# Altium PCB Module-POWER.PcbDoc
Units mil, origin at the board's own origin, x right, y up, seen from the top; angles counter-clockwise.
Board outline 6000 x 4000 mil, 2 copper layers (Top Layer, Bottom Layer); 39 components, 17 nets, 101 pads, 0 vias.
Unrouted connection lines stored in the file: 82.
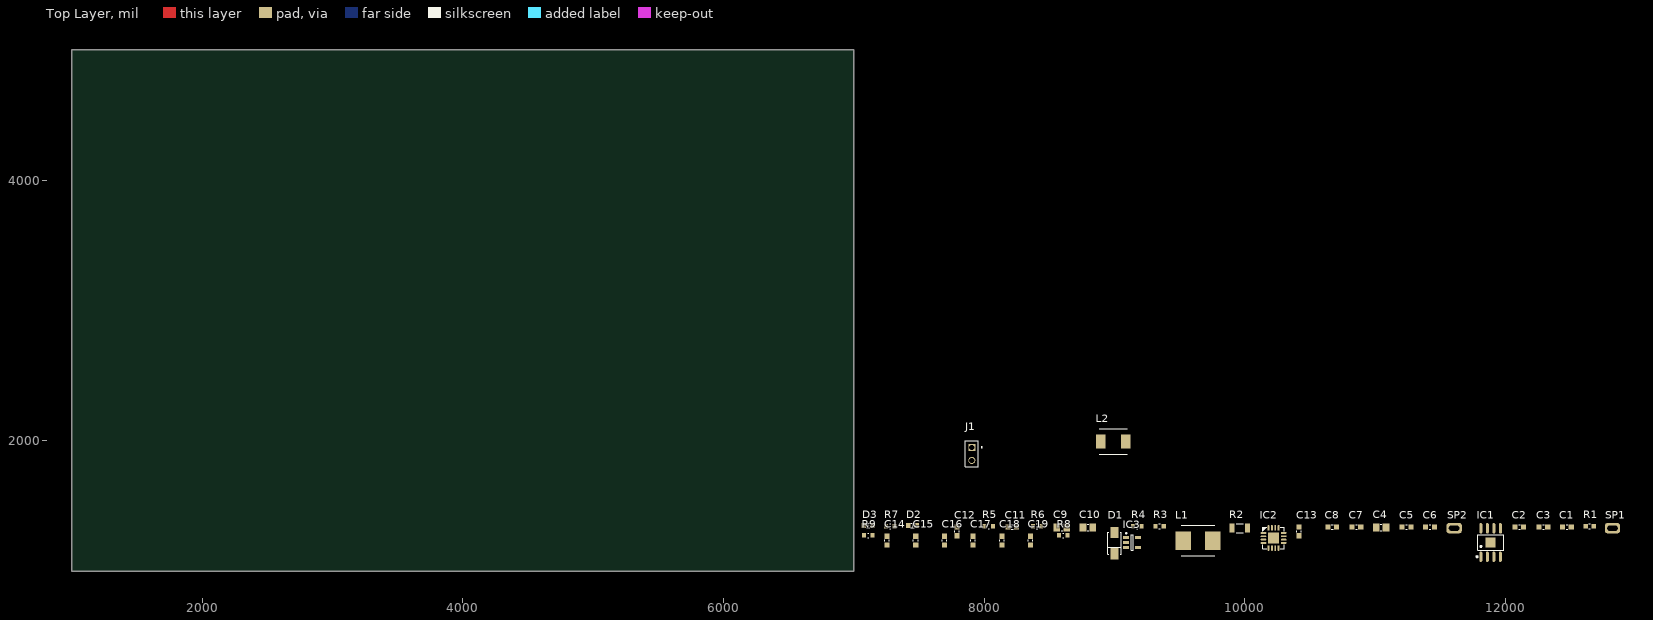
[diagram p0: Top Layer view]
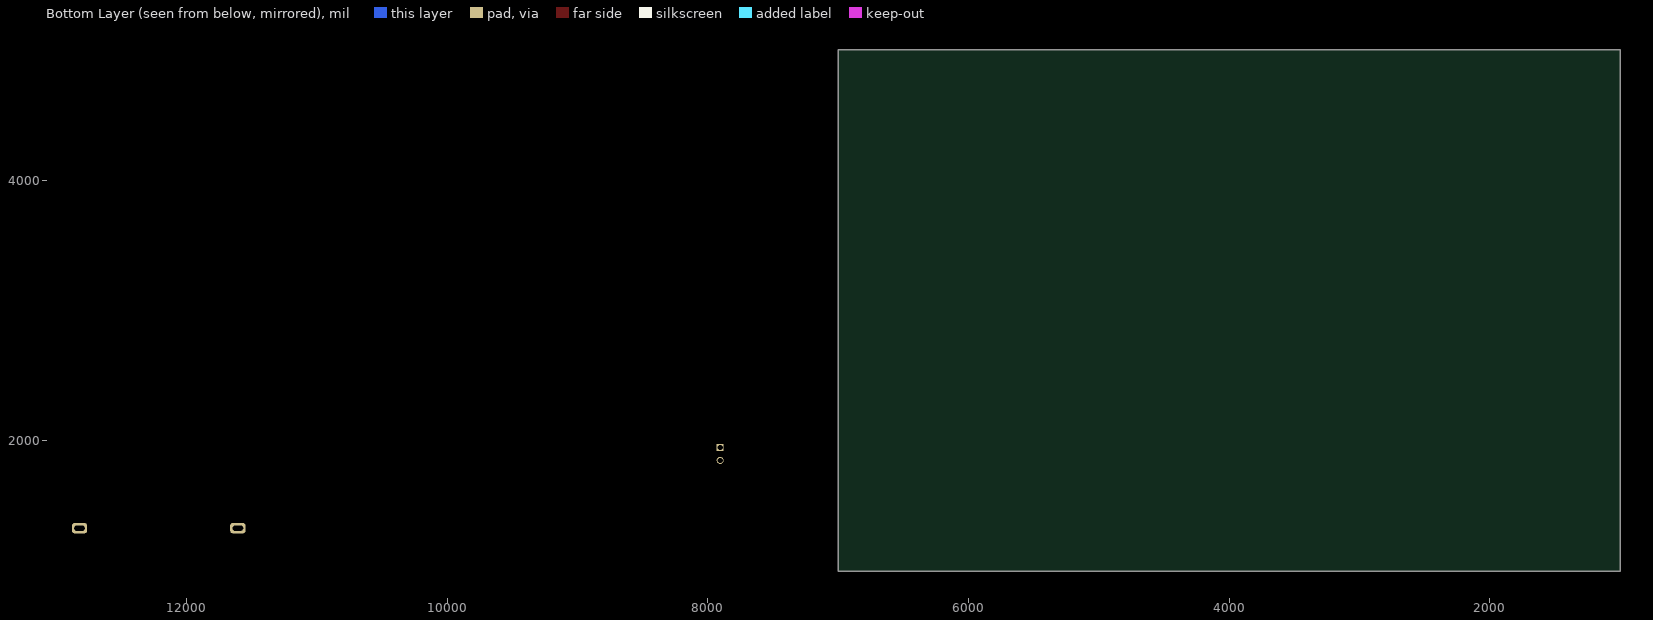
[diagram p1: Bottom Layer view, seen from below]

## Layer stack, top to bottom
Top Solder: solder mask 0.4, Solder Resist, Dk 3.5
Top Layer: signal copper 1.4
Dielectric 1: dielectric 12.6, FR-4, Dk 4.8
Bottom Layer: signal copper 1.4
Bottom Solder: solder mask 0.4, Solder Resist, Dk 3.5

## Board outline
1000,1000 7000,1000 7000,5000 1000,5000

## Design rules (kind name [scope] priority, off if disabled: settings)
Clearance [All] p1: gap=10 ignorepadtopadclearanceinfootprint=FALSE except(0: Arc-Hole Track-Hole SMDPad-Hole THPad-Hole Via-Hole Fill-Hole Poly-Hole Region-Hole Text-Hole)
PolygonConnect [All] p1: connectstyle=Relief reliefconductorwidth=10 reliefentries=4 polygonreliefangle="90 Angle" airgapwidth=10
RoutingVias [All] p1: holewidth=28 width=50 viastyle="Through Hole" minholewidth=28 minwidth=50 maxholewidth=28 maxwidth=50
SolderMaskExpansion [All] p1: expansion=4 istentingtop=FALSE
Width [All] p1: maxlimit=10 minlimit=10 preferedwidth=10
30 further rules are at their usual default settings.

## Components (designator, comment, footprint, x,y, rotation, side; value= is the part's Value field where it differs from the comment)
C1 "0.1 µF ±10% 16V Ceramic Capacitor X7R 0603 (1608 Metric)" SMD-CAP-0603-YAGEO 12470,1340 r0 top value=0.1uF
C2 "22 µF ±20% 10V Ceramic Capacitor X5R 0603 (1608 Metric)" SMD-CAP-0603-YAGEO 12105,1340 r0 top value=22uF
C3 "22 µF ±20% 10V Ceramic Capacitor X5R 0603 (1608 Metric)" SMD-CAP-0603-YAGEO 12290,1340 r0 top value=22uF
C4 "22 µF ±20% 25V Ceramic Capacitor X5R 0805 (2012 Metric)" SMD-CAP-0805-YAGEO 11045,1335 r0 top value=22uF
C5 "2.2 µF ±10% 25V Ceramic Capacitor X5R 0603 (1608 Metric)" SMD-CAP-0603-YAGEO 11240,1340 r0 top value=2.2uF
C6 "0.1 µF ±10% 100V Ceramic Capacitor X7R 0603 (1608 Metric)" SMD-CAP-0603-YAGEO 11420,1340 r0 top value=0.1uF
C7 "0.1 µF ±10% 100V Ceramic Capacitor X7R 0603 (1608 Metric)" SMD-CAP-0603-YAGEO 10855,1340 r0 top value=0.1uF
C8 "0.1 µF ±10% 100V Ceramic Capacitor X7R 0603 (1608 Metric)" SMD-CAP-0603-YAGEO 10670,1340 r0 top value=0.1uF
C9 "22 µF ±20% 25V Ceramic Capacitor X5R 0805 (2012 Metric)" SMD-CAP-0805-YAGEO 8595,1335 r0 top value=22uF
C10 "22 µF ±20% 25V Ceramic Capacitor X5R 0805 (2012 Metric)" SMD-CAP-0805-YAGEO 8795,1335 r0 top value=22uF
C11 "0.1 µF ±10% 100V Ceramic Capacitor X7R 0603 (1608 Metric)" SMD-CAP-0603-YAGEO 8215,1340 r0 top value=0.1uF
C12 "100 pF ±5% 50V Ceramic Capacitor C0G, NP0 0603 (1608 Metric)" SMD-CAP-0603-YAGEO 7790,1305 r90 top value=100pF
C13 "0.1 µF ±10% 100V Ceramic Capacitor X7R 0603 (1608 Metric)" SMD-CAP-0603-YAGEO 10415,1305 r90 top value=0.1uF
C14 "10 µF ±20% 25V Ceramic Capacitor X5R 0603 (1608 Metric)" SMD-CAP-0603-YAGEO 7255,1235 r90 top value=10uF
C15 "1 µF -20%, +80% 10V Ceramic Capacitor Y5V (F) 0603 (1608 Metric)" SMD-CAP-0603-YAGEO 7475,1235 r90 top value=1uF
C16 "0.1 µF ±10% 16V Ceramic Capacitor X7R 0603 (1608 Metric)" SMD-CAP-0603-YAGEO 7695,1235 r90 top value=0.1uF
C17 "10 µF ±20% 25V Ceramic Capacitor X5R 0603 (1608 Metric)" SMD-CAP-0603-YAGEO 7915,1235 r90 top value=10uF
C18 "1 µF -20%, +80% 10V Ceramic Capacitor Y5V (F) 0603 (1608 Metric)" SMD-CAP-0603-YAGEO 8135,1235 r90 top value=1uF
C19 "0.1 µF ±10% 16V Ceramic Capacitor X7R 0603 (1608 Metric)" SMD-CAP-0603-YAGEO 8355,1235 r90 top value=0.1uF
D1 "Diode 40 V 3A Surface Mount DO-214AC (SMA)" SMD-DO-214AC-214-CT 9000,1215 r90 top
D2 "0603 GREEN" LED0603_GREEN 7450,1350 r0 top
D3 "0603 RED" LED0603_RED 7110,1350 r0 top
IC1 "XB8089D" SOIC-8-XB8089D 11885,1220 r0 top
IC2 "5V~12V Lithium-ion/Polymer 1~2 2A TQFN-16-EP(4x4) Battery Management ROHS" "TQFN-16 - TP5100" 10220,1255 r0 top
IC3 "MT3410LB-N" SOT23-5-MT3410 9135,1220 r0 top
J1 "Connector Header Through Hole 2 position" HEADER-2.54-2 7905,1900 r90 top
L1 "10 µH Shielded Drum Core, Wirewound Inductor 3.7 A 74.8mOhm Max 2-SMD, J-Lead" SMD-HxLxW-4.5x6.5x6.0-PEC 9640,1235 r0 top value=10uH
L2 "2.2 µH Shielded Drum Core, Wirewound Inductor 6.3 A 22mOhm Max 2-SMD, J-Lead" SMD-HxLxW-3.0x5.5x5.0-PEC 8990,1995 r0 top value=2.2uH
R1 "100 Ohms ±1% 0.1W, 1/10W Chip Resistor 0603 (1608 Metric) Automotive AEC-Q200, High Voltage Thick Film" SMD-RES-0603-RS 12645,1345 r0 top value=100R
R2 "100 mOhms ±5% 0.25W, 1/4W Chip Resistor 1206 (3216 Metric) Current Sense Thick Film" SMD-RES-1206-YAGEO 9960,1330 r0 top value=0.1R
R3 "10 kOhms ±1% 0.1W, 1/10W Chip Resistor 0603 (1608 Metric) Moisture Resistant Thick Film" SMD-RES-0603-YAGEO 9345,1345 r0 top value=10K
R4 "3 Ohms ±1% 0.1W, 1/10W Chip Resistor 0603 (1608 Metric) Thin Film" SMD-RES-0603-YAGEO 9175,1345 r0 top value=3R
R5 "10 kOhms ±1% 0.1W, 1/10W Chip Resistor 0603 (1608 Metric) Moisture Resistant Thick Film" SMD-RES-0603-YAGEO 8035,1345 r0 top value=10K
R6 "51 kOhms ±1% 0.1W, 1/10W Chip Resistor 0603 (1608 Metric) Moisture Resistant Thick Film" SMD-RES-0603-YAGEO 8405,1345 r0 top value=51K
R7 "10 kOhms ±1% 0.1W, 1/10W Chip Resistor 0603 (1608 Metric) Moisture Resistant Thick Film" SMD-RES-0603-YAGEO 7280,1345 r0 top value=10K
R8 "100 kOhms ±1% 0.1W, 1/10W Chip Resistor 0603 (1608 Metric) Moisture Resistant Thick Film" SMD-RES-0603-YAGEO 8605,1275 r0 top value=100K
R9 "22 kOhms ±1% 0.1W, 1/10W Chip Resistor 0603 (1608 Metric) Moisture Resistant Thick Film" SMD-RES-0603-YAGEO 7110,1275 r0 top value=22K
SP1 "SP" "SOLDERING PAD BIG 3" 12820,1330 r0 top
SP2 "SP" "SOLDERING PAD BIG 3" 11605,1330 r0 top

## Footprints (in the part's own frame and the unit in brackets; to place one, negate y for a bottom-side part, rotate by r counter-clockwise, add the part's x,y. Pads: shape width x height; smd on the part's side, far side on the other; paste and mask are expansions set on the pad)
HEADER-2.54-2 [mm]
  rect 1.37x1.37 hole 1.02: 01(1.27,0)
  round 1.37 hole 1.02: 02(-1.27,0)
  silkscreen extent -2.54,-2.02 2.54,1.27, body extent -2.54,-1.27 2.54,1.27, height 10.62
LED0603_GREEN [mm]
  rect 0.9x1 smd paste+0 mask+0.051: 1(-0.85,0) 2(0.85,0)
  silkscreen extent -0.3,-0.43 0.3,0.43, body extent -0.82,-0.4 0.78,0.4, height 0.53
LED0603_RED [mm]
  rect 0.9x1 smd paste+0 mask+0.051: 1(-0.85,0) 2(0.85,0)
  silkscreen extent -0.3,-0.43 0.3,0.43, body extent -0.82,-0.4 0.78,0.4, height 0.53
SMD-CAP-0603-YAGEO [mm]
  rect 1x1 smd: 1(-0.85,0) 2(0.85,0)
  silkscreen extent -0.15,-0.45 0.15,0.45, body extent -0.8,-0.4 0.8,0.4, height 0.87
SMD-CAP-0805-YAGEO [mm]
  rect 1.3x1.5 smd: 1(-0.95,0) 2(0.95,0)
  silkscreen extent -0.15,-0.65 0.15,0.65, body extent -1,-0.63 1,0.63, height 1.35
SMD-DO-214AC-214-CT [mm]
  rect 2.17x1.57 smd: 1(-2.065,0) 2(2.065,0)
  silkscreen extent -2.12,-1.35 2.12,1.33, body extent -2.47,-1.25 2.47,1.25, height 2.2
SMD-HxLxW-3.0x5.5x5.0-PEC [mm]
  rect 1.905x2.79 smd: 1(-2.425,0) 2(2.425,0)
  silkscreen extent -2.75,-2.5 2.75,2.5, body extent -2.75,-2.5 2.75,2.5, height 3.01
SMD-HxLxW-4.5x6.5x6.0-PEC [mm]
  rect 3x3.6 smd: 1(-2.9,0) 2(2.9,0)
  silkscreen extent -3.25,-3 3.25,3, body extent -3.25,-3 3.25,3, height 4.47
SMD-RES-0603-RS [mm]
  rect 0.87x0.93 smd: 1(-0.78,0) 2(0.78,0)
  silkscreen extent -0.15,-0.45 0.15,0.45, body extent -0.8,-0.4 0.8,0.4, height 0.47
SMD-RES-0603-YAGEO [mm]
  rect 0.79x0.93 smd: 1(-0.82,0) 2(0.82,0)
  silkscreen extent -0.11,-0.45 0.11,0.45, body extent -0.8,-0.4 0.8,0.4, height 0.47
SMD-RES-1206-YAGEO [mm]
  rect 0.97x1.73 smd: 1(-1.48,0) 2(1.48,0)
  silkscreen extent -0.67,-0.85 0.67,0.85, body extent -1.6,-0.8 1.6,0.8, height 0.62
SOIC-8-XB8089D [mm]
  oval 0.574x2.038 smd: 1(-1.905,-2.769) 2(-0.635,-2.769) 3(0.635,-2.769) 4(1.905,-2.769) 5(1.905,2.769) 6(0.635,2.769) 7(-0.635,2.769) 8(-1.905,2.769)
  rect 2x2 smd: 9(0,0)
  silkscreen extent -2.79,-2.92 2.53,1.52, body extent -2.45,-3 2.45,3, height 1.75
"SOLDERING PAD BIG 3" [mm]
  rrect50% 3x2 hole 1 slot 2 at 0 deg: 1(0,0)
SOT23-5-MT3410 [mm]
  rect 1.15x0.6 smd: 1(-1.175,0.95) 2(-1.175,0) 3(-1.175,-0.95) 4(1.175,-0.95) 5(1.175,0.95)
  silkscreen extent -1.3,-1.5 0.2,1.92, body extent -1.4,-1.45 1.4,1.45, height 1.45
"TQFN-16 - TP5100" [mil]
  oval 42.8x14.33 smd paste-3937 mask+2: 1(-77.5,38.39) 2(-77.5,12.79) 3(-77.5,-12.8) 4(-77.5,-38.39) 9(77.5,-38.39) 10(77.5,-12.8) 11(77.5,12.79) 12(77.5,38.39)
  oval 14.33x42.8 smd paste-3937 mask+2: 5(-38.39,-77.5) 6(-12.8,-77.5) 7(12.79,-77.5) 8(38.39,-77.5) 13(38.39,77.5) 14(12.79,77.5) 15(-12.8,77.5) 16(-38.39,77.5)
  rect 82.68x82.68 smd paste-3937 mask+2: 17(0,0)
  silkscreen extent -82,-82 82,82, body extent -79,-79 79,79, height 31

## Part data
C1 C16 C19: library part "CAP; 0.1uF; 16V; 0603; SMD; CC0603KRX7R7BB104", "0603 0.1 uF 16 V ±10 % Tolerance X7R SMT Multilayer Ceramic Capacitor", Case Code (Imperial)=0603, Case Code (Metric)=1608, Dielectric=X7R, Insulation Resistance=100GR, Manufacturer=Yageo, Manufacturer Part Number=CC0603KRX7R7BB104, Max Operating Temperature=125°C, Min Operating Temperature=-55°C, Package Quantity=1, Supplier Part Number=311-1088-1-ND, Tolerance=10%, Voltage=16V, Case/Package=0603, Category="Ceramic Capacitors", ComponentLink1Description=https://datasheet.ciiva.com/11786/0900766b80d84f1d-11786077.pdf?src-supplier=Rs, ComponentLink1URL=https://datasheet.ciiva.com/11786/0900766b80d84f1d-11786077.pdf?src-supplier=Rs, ComponentLink2Description=https://datasheet.ciiva.com/8033/70765-8033799.pdf?src-supplier=Element14, ComponentLink2URL=https://datasheet.ciiva.com/8033/70765-8033799.pdf?src-supplier=Element14, ComponentLink3Description=https://datasheet.ciiva.com/7978/1489800-7978141.pdf?src-supplier=Element14, ComponentLink3URL=https://datasheet.ciiva.com/7978/1489800-7978141.pdf?src-supplier=Element14, ComponentLink4Description=https://datasheet.ciiva.com/28450/1489800-28450552.pdf?src-supplier=Element14, ComponentLink4URL=https://datasheet.ciiva.com/28450/1489800-28450552.pdf?src-supplier=Element14, ComponentLink5Description=https://datasheet.ciiva.com/46430/1734573-46430156.pdf?src-supplier=Element14, ComponentLink5URL=https://datasheet.ciiva.com/46430/1734573-46430156.pdf?src-supplier=Element14, ComponentLink6Description=https://datasheet.ciiva.com/144/mlccorderingcode-144183.pdf?src-supplier=Digikey, ComponentLink6URL=https://datasheet.ciiva.com/144/mlccorderingcode-144183.pdf?src-supplier=Digikey, ComponentLink7Description=https://datasheet.ciiva.com/144/mlccorderingcode-144182.pdf?src-supplier=Digikey, ComponentLink7URL=https://datasheet.ciiva.com/144/mlccorderingcode-144182.pdf?src-supplier=Digikey, ComponentLink8Description=https://datasheet.ciiva.com/144/mlccorderingcode-144184.pdf?src-supplier=Digikey, ComponentLink8URL=https://datasheet.ciiva.com/144/mlccorderingcode-144184.pdf?src-supplier=Digikey, ComponentLink9Description=https://datasheet.ciiva.com/8033/1734573-8033797.pdf?src-supplier=Element14, ComponentLink9URL=https://datasheet.ciiva.com/8033/1734573-8033797.pdf?src-supplier=Element14, ComponentLink10Description=https://datasheet.ciiva.com/13395/upy-gphc-x7r-6-3v-to-50v-8-13395674.pdf?src-supplier=Mouser, ComponentLink10URL=https://datasheet.ciiva.com/13395/upy-gphc-x7r-6-3v-to-50v-8-13395674.pdf?src-supplier=Mouser, ComponentLink11Description=https://datasheet.ciiva.com/11464/upy-gphc-x7r-6-3v-to-50v-8-11464735.pdf?src-supplier=Avnet, ComponentLink11URL=https://datasheet.ciiva.com/11464/upy-gphc-x7r-6-3v-to-50v-8-11464735.pdf?src-supplier=Avnet, ComponentLink12Description=https://datasheet.ciiva.com/15165/getdatasheetpartid-63554-15165387.pdf?src-supplier=Verical, ComponentLink12URL=https://datasheet.ciiva.com/15165/getdatasheetpartid-63554-15165387.pdf?src-supplier=Verical, ComponentLink13Description="Link Digikey", ComponentLink13URL=https://www.digikey.com/en/products/detail/yageo/CC0603KRX7R7BB104/302822, Depth=0.8mm, Designer=TVBac, Halogen Free="Halogen Free", Height=0.8mm, Lead Free="Lead Free", Length=1.6mm, Material=Ceramic, Mounting Technology="Surface Mount", Package=0603, Packaging="Tape and Reel", Pins=2, Pricing="1=0.1, 10=0.042, 50=0.0238, 100=0.0185, 500=0.01392, 1000=0.01094, 4000=0.00915, 8000=0.00836, 12000=0.00796, 28000=0.00756, 100000=0.00547, 200000=0.00529, 400000=0.00497 (USD)", Radiation Hardening=No, Reach SVHC Compliant=No, RoHS=Yes, RoHS Compliant=Yes, Series=CC, Stock=8705780, Supplier=Digikey, Termination=SMD/SMT, Thickness=0.035inch, Voltage Rating=16V, Voltage Rating (DC)=16V, Width=0.031inch
C2 C3: library part "CAP; 22uF; 25V; SMD; CC0603MRX5R6BB226", "Multilayer Ceramic Capacitor, 22 uF, 10 V, ï¿½ 20%, X5R, 0603 [1608 Metric]", Manufacturer=Yageo, Manufacturer Part Number=CC0603MRX5R6BB226, Package=0603, Supplier Part Number=9078094, Category="Ceramic Capacitors", ComponentLink1Description=http://www.mouser.com/ds/2/447/Yageo_UPY-GP_NP0_16V-to-50V_9-358835.pdf?src-supplier=Mouser, ComponentLink1URL=http://www.mouser.com/ds/2/447/Yageo_UPY-GP_NP0_16V-to-50V_9-358835.pdf?src-supplier=Mouser, ComponentLink2Description=http://www.yageo.com/documents/recent/UPY-GPHC_X5R_4V-to-50V_25.pdf?src-supplier=Digikey, ComponentLink2URL=http://www.yageo.com/documents/recent/UPY-GPHC_X5R_4V-to-50V_25.pdf?src-supplier=Digikey, ComponentLink3Description=https://datasheet.octopart.com/CC0603MRX5R6BB226-Yageo-datasheet-137875056.pdf?src-supplier=Future+Electronics, ComponentLink3URL=https://datasheet.octopart.com/CC0603MRX5R6BB226-Yageo-datasheet-137875056.pdf?src-supplier=Future+Electronics, ComponentLink4Description="Link Digikey", ComponentLink4URL=https://www.digikey.com/en/products/detail/yageo/CC0603MRX5R6BB226/5195226, Designer=TVBac, Halogen Free=5694HalogenFree, Lead Free=5697LeadFree, Pricing="4000=0.122, 8000=0.12, 12000=0.119, 16000=0.118 (USD)", RoHS=No, RoHS Compliant=5897YesNo, Stock=780000, Supplier="Future Electronics"
C4 C9 C10: library part "CAP; 22uF; 0805; 25V; SMD; CC0805MKX5R8BB226", "Ceramic Capacitor, Multilayer, Ceramic, 25V, 20% +Tol, 20% -Tol, X5R, 15% TC, 22uF, Surface Mount, 0805", Manufacturer=Yageo, Manufacturer Part Number=CC0805MKX5R8BB226, Package=0805, Supplier Part Number=5072123, Category="Ceramic Capacitors", ComponentLink1Description=http://www.mouser.com/ds/2/447/Yageo_UPY-GP_NP0_16V-to-50V_9-358835.pdf?src-supplier=Mouser, ComponentLink1URL=http://www.mouser.com/ds/2/447/Yageo_UPY-GP_NP0_16V-to-50V_9-358835.pdf?src-supplier=Mouser, ComponentLink2Description=http://www.yageo.com/documents/recent/UPY-GPHC_X5R_4V-to-50V_25.pdf?src-supplier=Digikey, ComponentLink2URL=http://www.yageo.com/documents/recent/UPY-GPHC_X5R_4V-to-50V_25.pdf?src-supplier=Digikey, ComponentLink3Description=https://datasheet.octopart.com/CC0805MKX5R8BB226-Yageo-datasheet-137700085.pdf?src-supplier=Future+Electronics, ComponentLink3URL=https://datasheet.octopart.com/CC0805MKX5R8BB226-Yageo-datasheet-137700085.pdf?src-supplier=Future+Electronics, ComponentLink4Description=https://datasheet.octopart.com/CC0805MKX5R8BB226-Yageo-datasheet-181969996.pdf?src-supplier=Farnell, ComponentLink4URL=https://datasheet.octopart.com/CC0805MKX5R8BB226-Yageo-datasheet-181969996.pdf?src-supplier=Farnell, ComponentLink5Description=https://datasheet.octopart.com/CC0805MKX5R8BB226-Yageo-datasheet-181969996.pdf?src-supplier=Element14, ComponentLink5URL=https://datasheet.octopart.com/CC0805MKX5R8BB226-Yageo-datasheet-181969996.pdf?src-supplier=Element14, Halogen Free=5694HalogenFree, Lead Free=5697LeadFree, Material=4241ConductorMaterial, Pricing="3000=0.112, 6000=0.11, 9000=0.0776, 12000=0.077, 15000=0.0753 (USD)", RoHS=Yes, Stock=90000, Supplier="Future Electronics"
C5: library part "CAP; 2.2uF; 25V; SMD; 0603; CC0603KRX5R8BB225", "0603 2.2 uF 25 V ±10% Tolerance X5R SMT Multilayer Ceramic Capacitor", Manufacturer=Yageo, Manufacturer Part Number=CC0603KRX5R8BB225, Package=0603, Supplier Part Number=2077058, Category="Ceramic Capacitors", ComponentLink1Description=https://datasheet.ciiva.com/26936/getdatasheetpartid-782757-26936061.pdf?src-supplier=Verical, ComponentLink1URL=https://datasheet.ciiva.com/26936/getdatasheetpartid-782757-26936061.pdf?src-supplier=Verical, Designer=TVBac, Halogen Free=5694HalogenFree, Height=900um, Lead Free=5697LeadFree, Material=4241ConductorMaterial, Pricing="4000=0.0441, 8000=0.0434, 12000=0.0429, 16000=0.0426, 20000=0.0417 (USD)", RoHS=Yes, Stock=108000, Supplier="Future Electronics"
C6 C7 C8 C11 C13: library part "CAP; 0.1uF; 100V; 0603; SMD; CC0603KRX7R0BB104", "Multilayer Ceramic Capacitors MLCC - SMD/SMT 100V 0.1uF X7R 0603 10%", Case Code (Imperial)=0603, Case Code (Metric)=1608, Dielectric=X7R, Manufacturer=Yageo, Manufacturer Part Number=CC0603KRX7R0BB104, Max Operating Temperature=125°C, Min Operating Temperature=-55°C, Package Quantity=4000, Supplier Part Number=311-1523-1-ND, Tolerance=10%, Voltage Rating=100V, Case/Package=0603, Category="Ceramic Capacitors", ComponentLink1Description=https://datasheet.ciiva.com/6277/mlccorderingcode-6277082.pdf?src-supplier=Digikey, ComponentLink1URL=https://datasheet.ciiva.com/6277/mlccorderingcode-6277082.pdf?src-supplier=Digikey, ComponentLink2Description=https://datasheet.ciiva.com/6277/mlccorderingcode-6277081.pdf?src-supplier=Digikey, ComponentLink2URL=https://datasheet.ciiva.com/6277/mlccorderingcode-6277081.pdf?src-supplier=Digikey, ComponentLink3Description=https://datasheet.ciiva.com/6277/mlccorderingcode-6277030.pdf?src-supplier=Digikey, ComponentLink3URL=https://datasheet.ciiva.com/6277/mlccorderingcode-6277030.pdf?src-supplier=Digikey, ComponentLink4Description="Link Digikey", ComponentLink4URL=https://www.digikey.com/en/products/detail/yageo/CC0603KRX7R0BB104/3476111?s=N4IgTCBcDaIMwEYEFoEFYx1cgcgERAF0BfIA, Designer=TVBac, Height=900um, Lead Free=5697LeadFree, Length=0.063inch, Material=4241ConductorMaterial, Mounting Technology="Surface Mount", Package=0603, Packaging="Tape and Reel", Pricing="1=0.17, 10=0.113, 50=0.0676, 100=0.0531, 500=0.03922, 1000=0.03246, 4000=0.02764, 8000=0.02572, 12000=0.02443, 28000=0.02314, 100000=0.01752, 200000=0.0171, 400000=0.01607 (USD)", RoHS=Yes, RoHS Compliant=Yes, Series=CC, Stock=5373598, Supplier=Digikey, Termination=SMD/SMT, Thickness=0.035inch, Voltage Rating (DC)=100V, Weight=7.1E-05oz, Width=0.031inch
C12: library part "CAP; 100pF; 0603; SMD; CC0603JRNPO9BN101", "0603 100 pF 50 V ±5 % Tolerance NP0 SMT Multilayer Ceramic Capacitor", Case Code (Imperial)=0603, Case Code (Metric)=1608, Dielectric=C0G, Insulation Resistance=100GR, Manufacturer=Yageo, Manufacturer Part Number=CC0603JRNPO9BN101, Max Operating Temperature=125°C, Min Operating Temperature=-55°C, Package Quantity=4000, Supplier Part Number=4143889, Temperature Coefficient=30ppm/°C, Tolerance=5%, Voltage=50V, Case/Package=0603, Category="Ceramic Capacitors", ComponentLink1Description=https://datasheet.ciiva.com/11786/0900766b8079c870-11786060.pdf?src-supplier=Rs, ComponentLink1URL=https://datasheet.ciiva.com/11786/0900766b8079c870-11786060.pdf?src-supplier=Rs, ComponentLink2Description=https://datasheet.ciiva.com/7978/1443161-7978127.pdf?src-supplier=Element14, ComponentLink2URL=https://datasheet.ciiva.com/7978/1443161-7978127.pdf?src-supplier=Element14, ComponentLink3Description=https://datasheet.ciiva.com/28450/1443161-28450457.pdf?src-supplier=Element14, ComponentLink3URL=https://datasheet.ciiva.com/28450/1443161-28450457.pdf?src-supplier=Element14, ComponentLink4Description=https://datasheet.ciiva.com/46430/1835847-46430151.pdf?src-supplier=Element14, ComponentLink4URL=https://datasheet.ciiva.com/46430/1835847-46430151.pdf?src-supplier=Element14, ComponentLink5Description=https://datasheet.ciiva.com/144/mlccorderingcode-144629.pdf?src-supplier=Digikey, ComponentLink5URL=https://datasheet.ciiva.com/144/mlccorderingcode-144629.pdf?src-supplier=Digikey, ComponentLink6Description=https://datasheet.ciiva.com/144/mlccorderingcode-144628.pdf?src-supplier=Digikey, ComponentLink6URL=https://datasheet.ciiva.com/144/mlccorderingcode-144628.pdf?src-supplier=Digikey, ComponentLink7Description=https://datasheet.ciiva.com/144/mlccorderingcode-144630.pdf?src-supplier=Digikey, ComponentLink7URL=https://datasheet.ciiva.com/144/mlccorderingcode-144630.pdf?src-supplier=Digikey, ComponentLink8Description=https://datasheet.ciiva.com/11464/upy-gp-np0-16v-to-50v-8-11464725.pdf?src-supplier=Avnet, ComponentLink8URL=https://datasheet.ciiva.com/11464/upy-gp-np0-16v-to-50v-8-11464725.pdf?src-supplier=Avnet, ComponentLink9Description=https://datasheet.ciiva.com/26829/getdatasheetpartid-403525-26829372.pdf?src-supplier=Verical, ComponentLink9URL=https://datasheet.ciiva.com/26829/getdatasheetpartid-403525-26829372.pdf?src-supplier=Verical, Depth=0.8mm, Halogen Free=5694HalogenFree, Height=0.8mm, Lead Free="Lead Free", Length=1.6mm, Mounting Technology="Surface Mount", Package=0603, Packaging="Tape and Reel", Pins=2, Pricing="4000=0.0039, 12000=0.0038, 20000=0.0037, 80000=0.0036, 120000=0.0035 (USD)", Radiation Hardening=No, Reach SVHC Compliant=Unknown, RoHS=Yes, RoHS Compliant=Yes, Series=CC, Stock=1960000, Supplier="Future Electronics", Termination=SMD/SMT, Voltage Rating=50V, Voltage Rating (AC)=50V, Voltage Rating (DC)=50V, Width=0.8mm
C14 C17: library part "CAP; 10uF; 25V; SMD; 0603; CC0603MRX5R8BB106", "Multilayer Ceramic Capacitor, 10 uF, 25 V, ï¿½ 20%, X5R, 0603 [1608 Metric]", Case Code (Imperial)=0603, Case Code (Metric)=1608, Dielectric=X5R, Manufacturer=Yageo, Manufacturer Part Number=CC0603MRX5R8BB106, Max Operating Temperature=85°C, Min Operating Temperature=-55°C, Supplier Part Number=3086968, Tolerance=20%, Voltage Rating=25V, Case/Package=0603, Category="Ceramic Capacitors", ComponentLink1Description=https://www.yageo.com/upload/media/product/productsearch/datasheet/mlcc/UPY-GPHC_X5R_4V-to-50V_26.pdf?src-supplier=Digikey, ComponentLink1URL=https://www.yageo.com/upload/media/product/productsearch/datasheet/mlcc/UPY-GPHC_X5R_4V-to-50V_26.pdf?src-supplier=Digikey, ComponentLink2Description=https://datasheet.octopart.com/CC0603MRX5R8BB106-Yageo-datasheet-182965619.pdf?src-supplier=Farnell, ComponentLink2URL=https://datasheet.octopart.com/CC0603MRX5R8BB106-Yageo-datasheet-182965619.pdf?src-supplier=Farnell, ComponentLink3Description="Link Digikey", ComponentLink3URL=https://www.digikey.com/en/products/detail/yageo/CC0603MRX5R8BB106/7164378, Designer=TVBac, Halogen Free="Halogen Free", Lead Free="Lead Free", Mounting Technology="Surface Mount", Package=0603, Packaging="Cut Tape", Pricing="4000=0.155, 8000=0.153, 12000=0.151 (USD)", RoHS=Yes, RoHS Compliant=Yes, Series=CC, Stock=296000, Supplier="Future Electronics", Voltage Rating (DC)=25V
C15 C18: library part "CAP; 1uF; 10V; 0603; SMD; CC0603ZRY5V6BB105", "Surface Mount Ceramic Multilayer Capacitor 1uF -20% to 80% Y5V 10V 0603 Paper T/R", Dielectric Material=4241ConductorMaterial, Manufacturer=Yageo, Manufacturer Part Number=CC0603ZRY5V6BB105, Package=0603, Supplier Part Number=311-1357-1-ND, Voltage Rating (AC)=10V, Category="Ceramic Capacitors", ComponentLink1Description=https://datasheet.ciiva.com/23768/97931-23768032.pdf?src-supplier=Newark, ComponentLink1URL=https://datasheet.ciiva.com/23768/97931-23768032.pdf?src-supplier=Newark, ComponentLink2Description=https://datasheet.ciiva.com/144/mlccorderingcode-144397.pdf?src-supplier=Digikey, ComponentLink2URL=https://datasheet.ciiva.com/144/mlccorderingcode-144397.pdf?src-supplier=Digikey, ComponentLink3Description=https://datasheet.ciiva.com/144/mlccorderingcode-144398.pdf?src-supplier=Digikey, ComponentLink3URL=https://datasheet.ciiva.com/144/mlccorderingcode-144398.pdf?src-supplier=Digikey, ComponentLink4Description=https://datasheet.ciiva.com/144/mlccorderingcode-144399.pdf?src-supplier=Digikey, ComponentLink4URL=https://datasheet.ciiva.com/144/mlccorderingcode-144399.pdf?src-supplier=Digikey, ComponentLink5Description=https://datasheet.ciiva.com/5425/upy-gphc-y5v-6-3v-to-50v-5-5425434.pdf?src-supplier=Mouser, ComponentLink5URL=https://datasheet.ciiva.com/5425/upy-gphc-y5v-6-3v-to-50v-5-5425434.pdf?src-supplier=Mouser, ComponentLink6Description=https://datasheet.ciiva.com/7978/1132289-7978185.pdf?src-supplier=Element14, ComponentLink6URL=https://datasheet.ciiva.com/7978/1132289-7978185.pdf?src-supplier=Element14, ComponentLink7Description=https://datasheet.ciiva.com/8033/1132289-8033926.pdf?src-supplier=Element14, ComponentLink7URL=https://datasheet.ciiva.com/8033/1132289-8033926.pdf?src-supplier=Element14, ComponentLink8Description=https://datasheet.ciiva.com/8033/1132289-8033928.pdf?src-supplier=Element14, ComponentLink8URL=https://datasheet.ciiva.com/8033/1132289-8033928.pdf?src-supplier=Element14, ComponentLink9Description="Link Digikey", ComponentLink9URL=https://www.digikey.com/en/products/detail/yageo/CC0603ZRY5V6BB105/2103095, Designer=TVBac, Halogen Free=5694HalogenFree, Lead Free=5697LeadFree, Pricing="1=0.1, 10=0.041, 50=0.0234, 100=0.0182, 500=0.01366, 1000=0.01074 (USD)", RoHS=Yes, Stock=2070294, Supplier=Digikey
D1: library part "DIODE; SMD; SCHOTTKY; SS34-HF", "Diode Schottky Si 40V 3A 2-Pin SMA T/R", Manufacturer=Comchip, Manufacturer Part Number=SS34-HF, Supplier Part Number=641-2115-1-ND, Category=LDO, ComponentLink1Description=http://www.comchiptech.com/admin/files/product/20190514101641.pdf?src-supplier=Digikey, ComponentLink1URL=http://www.comchiptech.com/admin/files/product/20190514101641.pdf?src-supplier=Digikey, ComponentLink2Description="Link Digikey", ComponentLink2URL=https://www.digikey.com/en/products/detail/comchip-technology/SS34-HF/10279693, Designer=TVBac, Pricing="1=0.46, 10=0.325, 100=0.164, 500=0.14536, 1000=0.11312, 2000=0.10124 (USD)", RoHS=Yes, RoHS Compliant=Yes, Stock=65957, Supplier=Digikey
D2: library part L0603_GREEN, "225mcd~450mcd Colorless Transparent Lens -40℃~+85℃ Positive Stick 520nm~535nm Green 120° 70mW 2.4V~3V 0603 LED Indication - Discrete ROHS", Manufacture Part Number=A-SP192DGHC-C01-4T, Manufacturer=Amicc, Package=0603, Link=https://www.lcsc.com/product-detail/LED-Indication-Discrete_Amicc-A-SP192DGHC-C01-4T_C19171301.html?s_z=n_LED%200603%20green, Packaging="Cut Tape (CT)"
D3: library part L0603_RED, "20mA 330mcd Colorless Transparent Lens -20℃~+85℃ Positive Stick 620nm~630nm Red 120° 50mW 2.3V 0603 LED Indication - Discrete ROHS", Manufacture Part Number=XL-1608SURC-06, Manufacturer=XINGLIGHT, Package=0603, Link=https://www.lcsc.com/product-detail/LED-Indication-Discrete_XINGLIGHT-XL-1608SURC-06_C965799.html?s_z=n_LED%200603%20red, Packaging="Cut Tape (CT)"
IC2: library part TP5100
IC3: "SOT-23-5 DC-DC Converters ROHS", LCSC Part=C42420805, Manufacturer="XI'AN Aerosemi Tech", Package=SOT-23-5, Link=https://www.lcsc.com/product-detail/DC-DC-Converters_XI-AN-Aerosemi-Tech-MT3410LB-N_C42420805.html?s_z=n_mt3410l, Manufacture Part Number=MT3410LB-N, Packaging="Cut Tape"
J1: library part "HEADER; 2PIN; 2.54; VER; TSW-101-15-T-D", "Headers & Wire Housings Classic PCB Header Strips, 0.100 pitch", Manufacturer=Samtec, Manufacturer Part Number=TSW-101-15-T-D, Category=Connectors, ComponentLink1Description=https://datasheet.ciiva.com/10283/htsw-th-10283318.pdf?src-supplier=Avnet, ComponentLink1URL=https://datasheet.ciiva.com/10283/htsw-th-10283318.pdf?src-supplier=Avnet, ComponentLink2Description="Link Digikey", ComponentLink2URL=https://www.digikey.com/en/products/detail/samtec-inc/TSW-101-15-T-D/7861723, Designer=TVBac, Pricing="1=0.18, 50=0.14, 100=0.12, 500=0.1, 1000=0.07, 2000=0.06, 5000=0.05 (USD)", RoHS=Yes, Stock=4464, Supplier="Arrow Electronics", Supplier Part Number=TSW-101-15-T-D
L1: library part "IND; 10uH; 3.7A; ETQ-P3M100HFN", "Power Choke Shielded Wirewound 10uH 20% 100KHz Metal 3.7A 0.0748Ohm DCR Automotive T/R", Case/Package=SMD/SMT, DC Resistance (DCR)=74.8mR, Manufacturer=Panasonic, Manufacturer Part Number=ETQ-P3M100HFN, Max Operating Temperature=150°C, Min Operating Temperature=-40°C, Ratings=AEC-Q200, Saturation Current=5.5A, Supplier Part Number=667-ETQ-P3M100HFN, Test Frequency=100kHz, Tolerance=20%, Category="Fixed Inductors", ComponentLink1Description=http://datasheet.octopart.com/ETQ-P3M100HFN-Panasonic-datasheet-136768817.pdf?src-supplier=Rs, ComponentLink1URL=http://datasheet.octopart.com/ETQ-P3M100HFN-Panasonic-datasheet-136768817.pdf?src-supplier=Rs, ComponentLink2Description=https://datasheet.octopart.com/ETQP3M100HFN-Panasonic-datasheet-179054672.pdf?src-supplier=Farnell, ComponentLink2URL=https://datasheet.octopart.com/ETQP3M100HFN-Panasonic-datasheet-179054672.pdf?src-supplier=Farnell, ComponentLink3Description=http://datasheet.octopart.com/ETQ-P3M100HFN-Panasonic-datasheet-136768817.pdf?src-supplier=Verical, ComponentLink3URL=http://datasheet.octopart.com/ETQ-P3M100HFN-Panasonic-datasheet-136768817.pdf?src-supplier=Verical, ComponentLink4Description=http://datasheet.octopart.com/ETQ-P3M100HFN-Panasonic-datasheet-136768817.pdf?src-supplier=Onlinecomponents.com, ComponentLink4URL=http://datasheet.octopart.com/ETQ-P3M100HFN-Panasonic-datasheet-136768817.pdf?src-supplier=Onlinecomponents.com, ComponentLink5Description=http://datasheet.octopart.com/ETQ-P3M100HFN-Panasonic-datasheet-136768817.pdf?src-supplier=Arrow+Electronics, ComponentLink5URL=http://datasheet.octopart.com/ETQ-P3M100HFN-Panasonic-datasheet-136768817.pdf?src-supplier=Arrow+Electronics, ComponentLink6Description=http://datasheet.octopart.com/ETQ-P3M100HFN-Panasonic-datasheet-136768817.pdf?src-supplier=Avnet, ComponentLink6URL=http://datasheet.octopart.com/ETQ-P3M100HFN-Panasonic-datasheet-136768817.pdf?src-supplier=Avnet, ComponentLink7Description=http://datasheet.octopart.com/ETQ-P3M100HFN-Panasonic-datasheet-136768817.pdf?src-supplier=Future+Electronics, ComponentLink7URL=http://datasheet.octopart.com/ETQ-P3M100HFN-Panasonic-datasheet-136768817.pdf?src-supplier=Future+Electronics, ComponentLink8Description=https://datasheet.octopart.com/ETQP3M100HFN-Panasonic-datasheet-97125959.pdf?src-supplier=Element14, ComponentLink8URL=https://datasheet.octopart.com/ETQP3M100HFN-Panasonic-datasheet-97125959.pdf?src-supplier=Element14, ComponentLink9Description=http://datasheet.octopart.com/ETQ-P3M100HFN-Panasonic-datasheet-136768817.pdf?src-supplier=Digikey, ComponentLink9URL=http://datasheet.octopart.com/ETQ-P3M100HFN-Panasonic-datasheet-136768817.pdf?src-supplier=Digikey, ComponentLink10Description=http://datasheet.octopart.com/ETQ-P3M100HFN-Panasonic-datasheet-136768817.pdf?src-supplier=Newark, ComponentLink10URL=http://datasheet.octopart.com/ETQ-P3M100HFN-Panasonic-datasheet-136768817.pdf?src-supplier=Newark, ComponentLink11Description=http://datasheet.octopart.com/ETQ-P3M100HFN-Panasonic-datasheet-136768817.pdf?src-supplier=Mouser, ComponentLink11URL=http://datasheet.octopart.com/ETQ-P3M100HFN-Panasonic-datasheet-136768817.pdf?src-supplier=Mouser, ComponentLink12Description=https://datasheet.octopart.com/ETQ-P3M100HFN-Panasonic-datasheet-136768817.pdf?src-supplier=Newark, ComponentLink12URL=https://datasheet.octopart.com/ETQ-P3M100HFN-Panasonic-datasheet-136768817.pdf?src-supplier=Newark, ComponentLink13Description=http://datasheet.octopart.com/ETQ-P3M100HFN-Panasonic-datasheet-136768817.pdf?src-supplier=TTI, ComponentLink13URL=http://datasheet.octopart.com/ETQ-P3M100HFN-Panasonic-datasheet-136768817.pdf?src-supplier=TTI, ComponentLink14Description=http://datasheet.octopart.com/ETQ-P3M100HFN-Panasonic-datasheet-136768817.pdf?src-supplier=Electro+Sonic, ComponentLink14URL=http://datasheet.octopart.com/ETQ-P3M100HFN-Panasonic-datasheet-136768817.pdf?src-supplier=Electro+Sonic, ComponentLink15Description=http://datasheet.octopart.com/ETQ-P3M100HFN-Panasonic-datasheet-136768817.pdf?src-supplier=NAC+Semi, ComponentLink15URL=http://datasheet.octopart.com/ETQ-P3M100HFN-Panasonic-datasheet-136768817.pdf?src-supplier=NAC+Semi, Core Material=Metal,Composite, Mounting Technology="Surface Mount", Packaging="Cut Tape", Pricing="1=1.11, 10=0.973, 50=0.756, 100=0.705, 1000=0.627, 10000=0.58 (USD)", RoHS=No, Series=PCC-M0630M, Shielding=Shielded, Stock=1835, Supplier=Mouser
L2: library part "IND; 2.2uH; SMD; 6.3A; ETQ-P3M2R2KVP", "Ind Power Shielded Wirewound 2.2uH 20% 100KHz Metal 6.3A (5.5 X 5 X 3mm) Emboss T/R", Case/Package=SMD/SMT, DC Resistance (DCR)=22mR, Inductance Tolerance=20%, Manufacturer=Panasonic, Manufacturer Part Number=ETQ-P3M2R2KVP, Max Operating Temperature=155°C, Min Operating Temperature=-55°C, Ratings=AEC-Q200, RMS Current (Irms)=5.2A, Saturation Current=10.1A, Supplier Part Number=P19759CT-ND, Test Frequency=100kHz, Category="Fixed Inductors", ComponentLink1Description=http://www.farnell.com/datasheets/2820815.pdf?src-supplier=Farnell, ComponentLink1URL=http://www.farnell.com/datasheets/2820815.pdf?src-supplier=Farnell, ComponentLink2Description=https://industrial.panasonic.com/cdbs/www-data/pdf/AGL0000/AGL0000C63.pdf?src-supplier=Digikey, ComponentLink2URL=https://industrial.panasonic.com/cdbs/www-data/pdf/AGL0000/AGL0000C63.pdf?src-supplier=Digikey, ComponentLink3Description=http://www.farnell.com/datasheets/2820815.pdf?src-supplier=Newark, ComponentLink3URL=http://www.farnell.com/datasheets/2820815.pdf?src-supplier=Newark, ComponentLink4Description=https://datasheet.octopart.com/ETQP3M2R2KVP-Panasonic-datasheet-98950113.pdf?src-supplier=Newark, ComponentLink4URL=https://datasheet.octopart.com/ETQP3M2R2KVP-Panasonic-datasheet-98950113.pdf?src-supplier=Newark, ComponentLink5Description=http://www.farnell.com/datasheets/2144948.pdf?src-supplier=Element14, ComponentLink5URL=http://www.farnell.com/datasheets/2144948.pdf?src-supplier=Element14, ComponentLink6Description=https://datasheet.octopart.com/ETQP3M2R2KVP-Panasonic-datasheet-65850535.pdf?src-supplier=Future+Electronics, ComponentLink6URL=https://datasheet.octopart.com/ETQP3M2R2KVP-Panasonic-datasheet-65850535.pdf?src-supplier=Future+Electronics, ComponentLink7Description=https://datasheet.octopart.com/ETQP3M2R2KVP-Panasonic-datasheet-137675050.pdf?src-supplier=TME, ComponentLink7URL=https://datasheet.octopart.com/ETQP3M2R2KVP-Panasonic-datasheet-137675050.pdf?src-supplier=TME, ComponentLink8Description="Link Digikey", ComponentLink8URL=https://www.digikey.com/en/products/detail/panasonic-electronic-components/ETQ-P3M2R2KVP/6134777, Core Material=Metal,Composite, Designer=TVBac, Mounting Technology="Surface Mount", Packaging="Cut Tape", Pricing="1=0.89, 10=0.752, 25=0.6836, 50=0.6426, 100=0.5333, 250=0.49224, 500=0.4649, 1000=0.42387 (USD)", Reach SVHC Compliant=Unknown, RoHS=Yes, RoHS Compliant=Yes, Series=PCC-M0530M, Shielding=Shielded, Stock=6203, Supplier=Digikey, Tolerance=20%
R1: library part "RES; 100R; 0603; SMD; KTR03EZPF1000", "Res Thick Film 0603 100 Ohm 1% 0.1W(1/10W) ±100ppm/C Pad SMD T/R Automotive AEC-Q200", Case Code (Imperial)=0603, Case Code (Metric)=1608, Manufacturer=Rohm, Manufacturer Part Number=KTR03EZPF1000, Max Operating Temperature=155°C, Max Power Dissipation=100mW, Min Operating Temperature=-55°C, Ratings=AEC-Q200, Supplier Part Number=755-KTR03EZPF1000, Temperature Coefficient=100ppm/°C, Tolerance=1%, Voltage Rating=350V, Case/Package=0603, Category="Chip SMD Resistors", ComponentLink1Description=https://datasheet.ciiva.com/14926/ktr-14926472.pdf?src-supplier=Digikey, ComponentLink1URL=https://datasheet.ciiva.com/14926/ktr-14926472.pdf?src-supplier=Digikey, ComponentLink2Description=https://datasheet.ciiva.com/14932/ktr-14932133.pdf?src-supplier=Digikey, ComponentLink2URL=https://datasheet.ciiva.com/14932/ktr-14932133.pdf?src-supplier=Digikey, ComponentLink3Description="Link Digikey", ComponentLink3URL=https://www.digikey.com/en/products/detail/rohm-semiconductor/KTR03EZPF1000/4051558, Designer=TVBac, Features="Automotive AEC-Q200", Number of Terminations=2, Package=0603, Packaging="Cut Tape", Pricing="1=0.12, 10=0.039, 50=0.039, 100=0.024, 1000=0.021, 10000=0.015 (USD)", RoHS=Yes, RoHS Compliant=Yes, Series=KTR, Stock=66325, Supplier=Mouser, Voltage Rating (DC)=350V
R2: library part "RES; 0.1R; 1206; SMD; RL1206JR-070R1L", "SMD Chip Resistor, 100 MOhm, ± 5%, 250 mW, 1206 [3216 Metric], Thick Film, Low Ohmic", Manufacturer=Yageo, Manufacturer Part Number=RL1206JR-070R1L, Package=1206, Supplier Part Number=1607514, Category="Chip SMD Resistors", ComponentLink1Description=https://datasheet.ciiva.com/8083/pyu-rl-521-rohs-l-5-8083925.pdf?src-supplier=Avnet, ComponentLink1URL=https://datasheet.ciiva.com/8083/pyu-rl-521-rohs-l-5-8083925.pdf?src-supplier=Avnet, ComponentLink2Description=https://datasheet.ciiva.com/5558/pyu-rl-hp-521-rohs-l-2-5558220.pdf?src-supplier=Mouser, ComponentLink2URL=https://datasheet.ciiva.com/5558/pyu-rl-hp-521-rohs-l-2-5558220.pdf?src-supplier=Mouser, Pricing="5000=0.0122, 10000=0.012, 15000=0.0119, 25000=0.0117, 50000=0.0114 (USD)", RoHS=Yes, Stock=195000, Supplier="Future Electronics"
R3 R5 R7: library part "RES; 10K; 0603; SMD; RC0603FR-0710KL", "SMD Chip Resistor, 10 Kohm, ½ 1%, 100 Mw, 0603 [1608 Metric], Thick Film, General Purpose", Case Code (Imperial)=0603, Case Code (Metric)=1608, Manufacturer=Yageo, Manufacturer Part Number=RC0603FR-0710KL, Max Operating Temperature=155°C, Max Power Dissipation=100mW, Min Operating Temperature=-55°C, Resistance Tolerance=1%, Resistor Type="Thick Film", Supplier Part Number=4023214, Temperature Coefficient=100ppm/°C, Voltage Rating=75V, Voltage Rating (DC)=50V, Case/Package=0603, Category="Chip SMD Resistors", Construction=Rectangular, Depth=0.8mm, Features="Moisture Resistant", Height=0.45mm, Lead Free=5697LeadFree, Lead Pitch=0.3mm, Length=1.6mm, Military Standard=Not, Number of Terminations=2, Package=0603, Packaging="Tape and Reel", Pins=2, Power Rating=100mW, Pricing="5000=0.0019, 20000=0.0018, 25000=0.0012, 50000=0.0018, 125000=0.0017, 200000=0.0016, 250000=0.0011, 750000=0.001 (USD)", Reach SVHC Compliant=No, RoHS=Yes, RoHS Compliant=Yes, Series=RC, Stock=60200000, Supplier="Future Electronics", Termination=SMD/SMT, Tolerance=1%, Weight=7.1E-05oz, Width=0.8mm
R4: library part "RES; 3R; 0603; SMD; RT0603FRE073RL", "Thin Film Res 0603 3 Ohm 1% 0.1W(1/10W) 50ppm/C Epoxy Pad SMD T/R", Case/Package=0603, Manufacturer=Yageo, Manufacturer Part Number=RT0603FRE073RL, Max Operating Temperature=155°C, Max Power Dissipation=100mW, Min Operating Temperature=-55°C, Supplier Part Number=13-RT0603FRE073RLCT-ND, Temperature Coefficient=50ppm/°C, Tolerance=1%, Category="Chip SMD Resistors", ComponentLink1Description=http://www.yageo.com/documents/recent/PYu-RT_1-to-0.01_RoHS_L_8.pdf?src-supplier=Digikey, ComponentLink1URL=http://www.yageo.com/documents/recent/PYu-RT_1-to-0.01_RoHS_L_8.pdf?src-supplier=Digikey, ComponentLink2Description=https://datasheet.octopart.com/RT0603FRE073RL-Yageo-datasheet-176402239.pdf?src-supplier=Newark, ComponentLink2URL=https://datasheet.octopart.com/RT0603FRE073RL-Yageo-datasheet-176402239.pdf?src-supplier=Newark, Features="Moisture Resistant", Height=0.022inch, Length=0.063inch, Number of Terminations=2, Package=0603, Packaging="Tape and Reel", Pricing="1=0.1, 10=0.024, 50=0.022, 100=0.0194, 500=0.01888, 1000=0.01836 (USD)", RoHS=Yes, RoHS Compliant=Yes, Series=RT, Stock=6986, Supplier=Digikey, Width=0.031inch
R6: library part "RES; 51K; 0603; SMD; RC0603FR-07510KL", "SMD Chip Resistor, 510 Kohm, ½ 1%, 100 Mw, 0603 [1608 Metric], Thick Film, General Purpose", Manufacturer=Yageo, Manufacturer Part Number=RC0603FR-07510KL, Package=0603, Supplier Part Number=2880904, Voltage Rating (DC)=50V, Category="Chip SMD Resistors", Lead Free=5697LeadFree, Pricing="5000=0.0012, 25000=0.0011, 125000=0.0011, 250000=0.001, 750000=0.001 (USD)", RoHS=Yes, Stock=435000, Supplier="Future Electronics"
R8: library part "RES; 100K; 0603; SMD; RC0603FR-07100KL", "SMD Chip Resistor, 100 kOhm, ï¿½ 1%, 100 mW, 0603 [1608 Metric], Thick Film, General Purpose", Case Code (Imperial)=0603, Case Code (Metric)=1608, Manufacturer=Yageo, Manufacturer Part Number=RC0603FR-07100KL, Max Operating Temperature=155°C, Max Power Dissipation=100mW, Min Operating Temperature=-55°C, Resistance Tolerance=1%, Resistor Type="Thick Film", Supplier Part Number=3697448, Temperature Coefficient=100ppm/°C, Voltage Rating=50V, Case/Package=0603, Category="Chip SMD Resistors", Construction=Rectangular, Depth=0.8mm, Features="Moisture Resistant", Height=0.45mm, Lead Free=5697LeadFree, Length=1.6mm, Military Standard=Not, Number of Terminations=2, Package=0603, Packaging="Tape and Reel", Pins=2, Power Rating=100mW, Pricing="5000=0.0011, 20000=0.0011, 75000=0.001, 150000=0.001, 375000=0.001 (USD)", Reach SVHC Compliant=No, RoHS=Yes, RoHS Compliant=Yes, Series=RC, Stock=2355000, Supplier="Future Electronics", Technology="THICK FILM", Termination=SMD/SMT, Tolerance=1%, Voltage Rating (DC)=50V, Width=0.8mm
R9: library part "RES; 22K; 0603; SMD; RC0603FR-0722KL", "SMD Chip Resistor 22 Kohm ½ 1% 100 Mw 0603 [1608 Metric] Thick Film General Purpose", Case Code (Imperial)=0603, Case Code (Metric)=1608, Current Rating=290mA, Manufacturer=Yageo, Manufacturer Part Number=RC0603FR-0722KL, Max Operating Temperature=155°C, Max Power Dissipation=100mW, Min Operating Temperature=-55°C, Package Quantity=1, Resistance Tolerance=1%, Resistor Type="Thick Film", Supplier Part Number=1933787, Temperature Coefficient=100ppm/°C, Voltage Rating=50V, Case/Package=0603, Category="Chip SMD Resistors", Construction=Rectangular, Depth=0.8mm, Diameter=8.5mm, Features="Moisture Resistant", Height=0.022inch, Lead Free=5697LeadFree, Lead Pitch=5mm, Length=0.063inch, Military Standard=Not, Number of Terminations=2, Package=0603, Packaging="Tape and Reel", Pins=2, Power Rating=100mW, Pricing="5000=0.0012, 20000=0.0011, 75000=0.0011, 150000=0.0011, 375000=0.001 (USD)", Radiation Hardening=5898YesNo, Reach SVHC Compliant=No, RoHS=Yes, RoHS Compliant=Yes, Series=RC, Shielding=202Shielding, Stock=5650000, Supplier="Future Electronics", Termination=SMD/SMT, Tolerance=1%, Voltage Rating (DC)=50V, Width=0.031inch
SP1 SP2: library part "SOLDERING PAD", "Soldering Pad"

## Nets (pads, with @x,y where several pads share a name; then routed paths per layer and width w, separated by ;. In a path a pad name is that pad's centre, name@x,y a point inside that pad or via, vN(x,y) a via of type N, cw(c..) or ccw(c..) an arc to the next point about the centre after c; other vN are vias at no path point)
3V3: C17.2 C18.2 C19.2 L2.2 R8.2
BAT+: C2.1 C3.2 C8.2 C9.2 C10.2 C14.2 C15.2 C16.2 IC2.9 IC3.1 IC3.4 R1.2 R2.2 SP1.1
BAT-: C1.1 IC1.5 IC1.7 IC1.8 IC1.9 SP2.1
GND: C2.2 C3.1 C4.1 C5.1 C6.1 C7.1 C8.1 C9.1 C10.1 C11.1 C12.1 C13.1 C14.1 C15.1 C16.1 C17.1 C18.1 C19.1 D1.2 IC1.1 IC1.2 IC1.3 IC1.4 IC2.7 IC2.17 IC3.2 J1.01 R5.2 R6.1 R9.1
NetC1_2: C1.2 IC1.6 R1.1
NetC7_2: C7.2 IC2.8 L1.2 R2.1
NetC11_2: C11.2 IC2.12 R6.2
NetC12_2: C12.2 R4.1
NetC13_2: C13.2 IC2.10 R3.2
NetD1_1: D1.1 IC2.2 IC2.3 L1.1 R4.2
NetD2_1: D2.1 D3.1 R7.1
NetD2_2: D2.2 IC2.14
NetD3_2: D3.2 IC2.15
NetIC2_11: IC2.11 J1.02 R3.1 R5.1
NetIC3_3: IC3.3 L2.1
NetIC3_5: IC3.5 R8.1 R9.2
VCC: C4.2 C5.2 C6.2 IC2.1 IC2.4 IC2.5 IC2.16 R7.2
pads on no net: IC2.6 IC2.13